# Altium PCB dalang-v1.3_20211125.PcbDoc (part 5 of 5)
Units mil, origin at the board's own origin, x right, y up, seen from the top; angles counter-clockwise.
Board outline 4000 x 3999.92 mil, 4 copper layers (Top, gnd, vcc, Bottom), stack 35.4 mil thick; 365 components, 335 nets, 1640 pads, 1414 vias.
Unrouted connection lines stored in the file: 894.
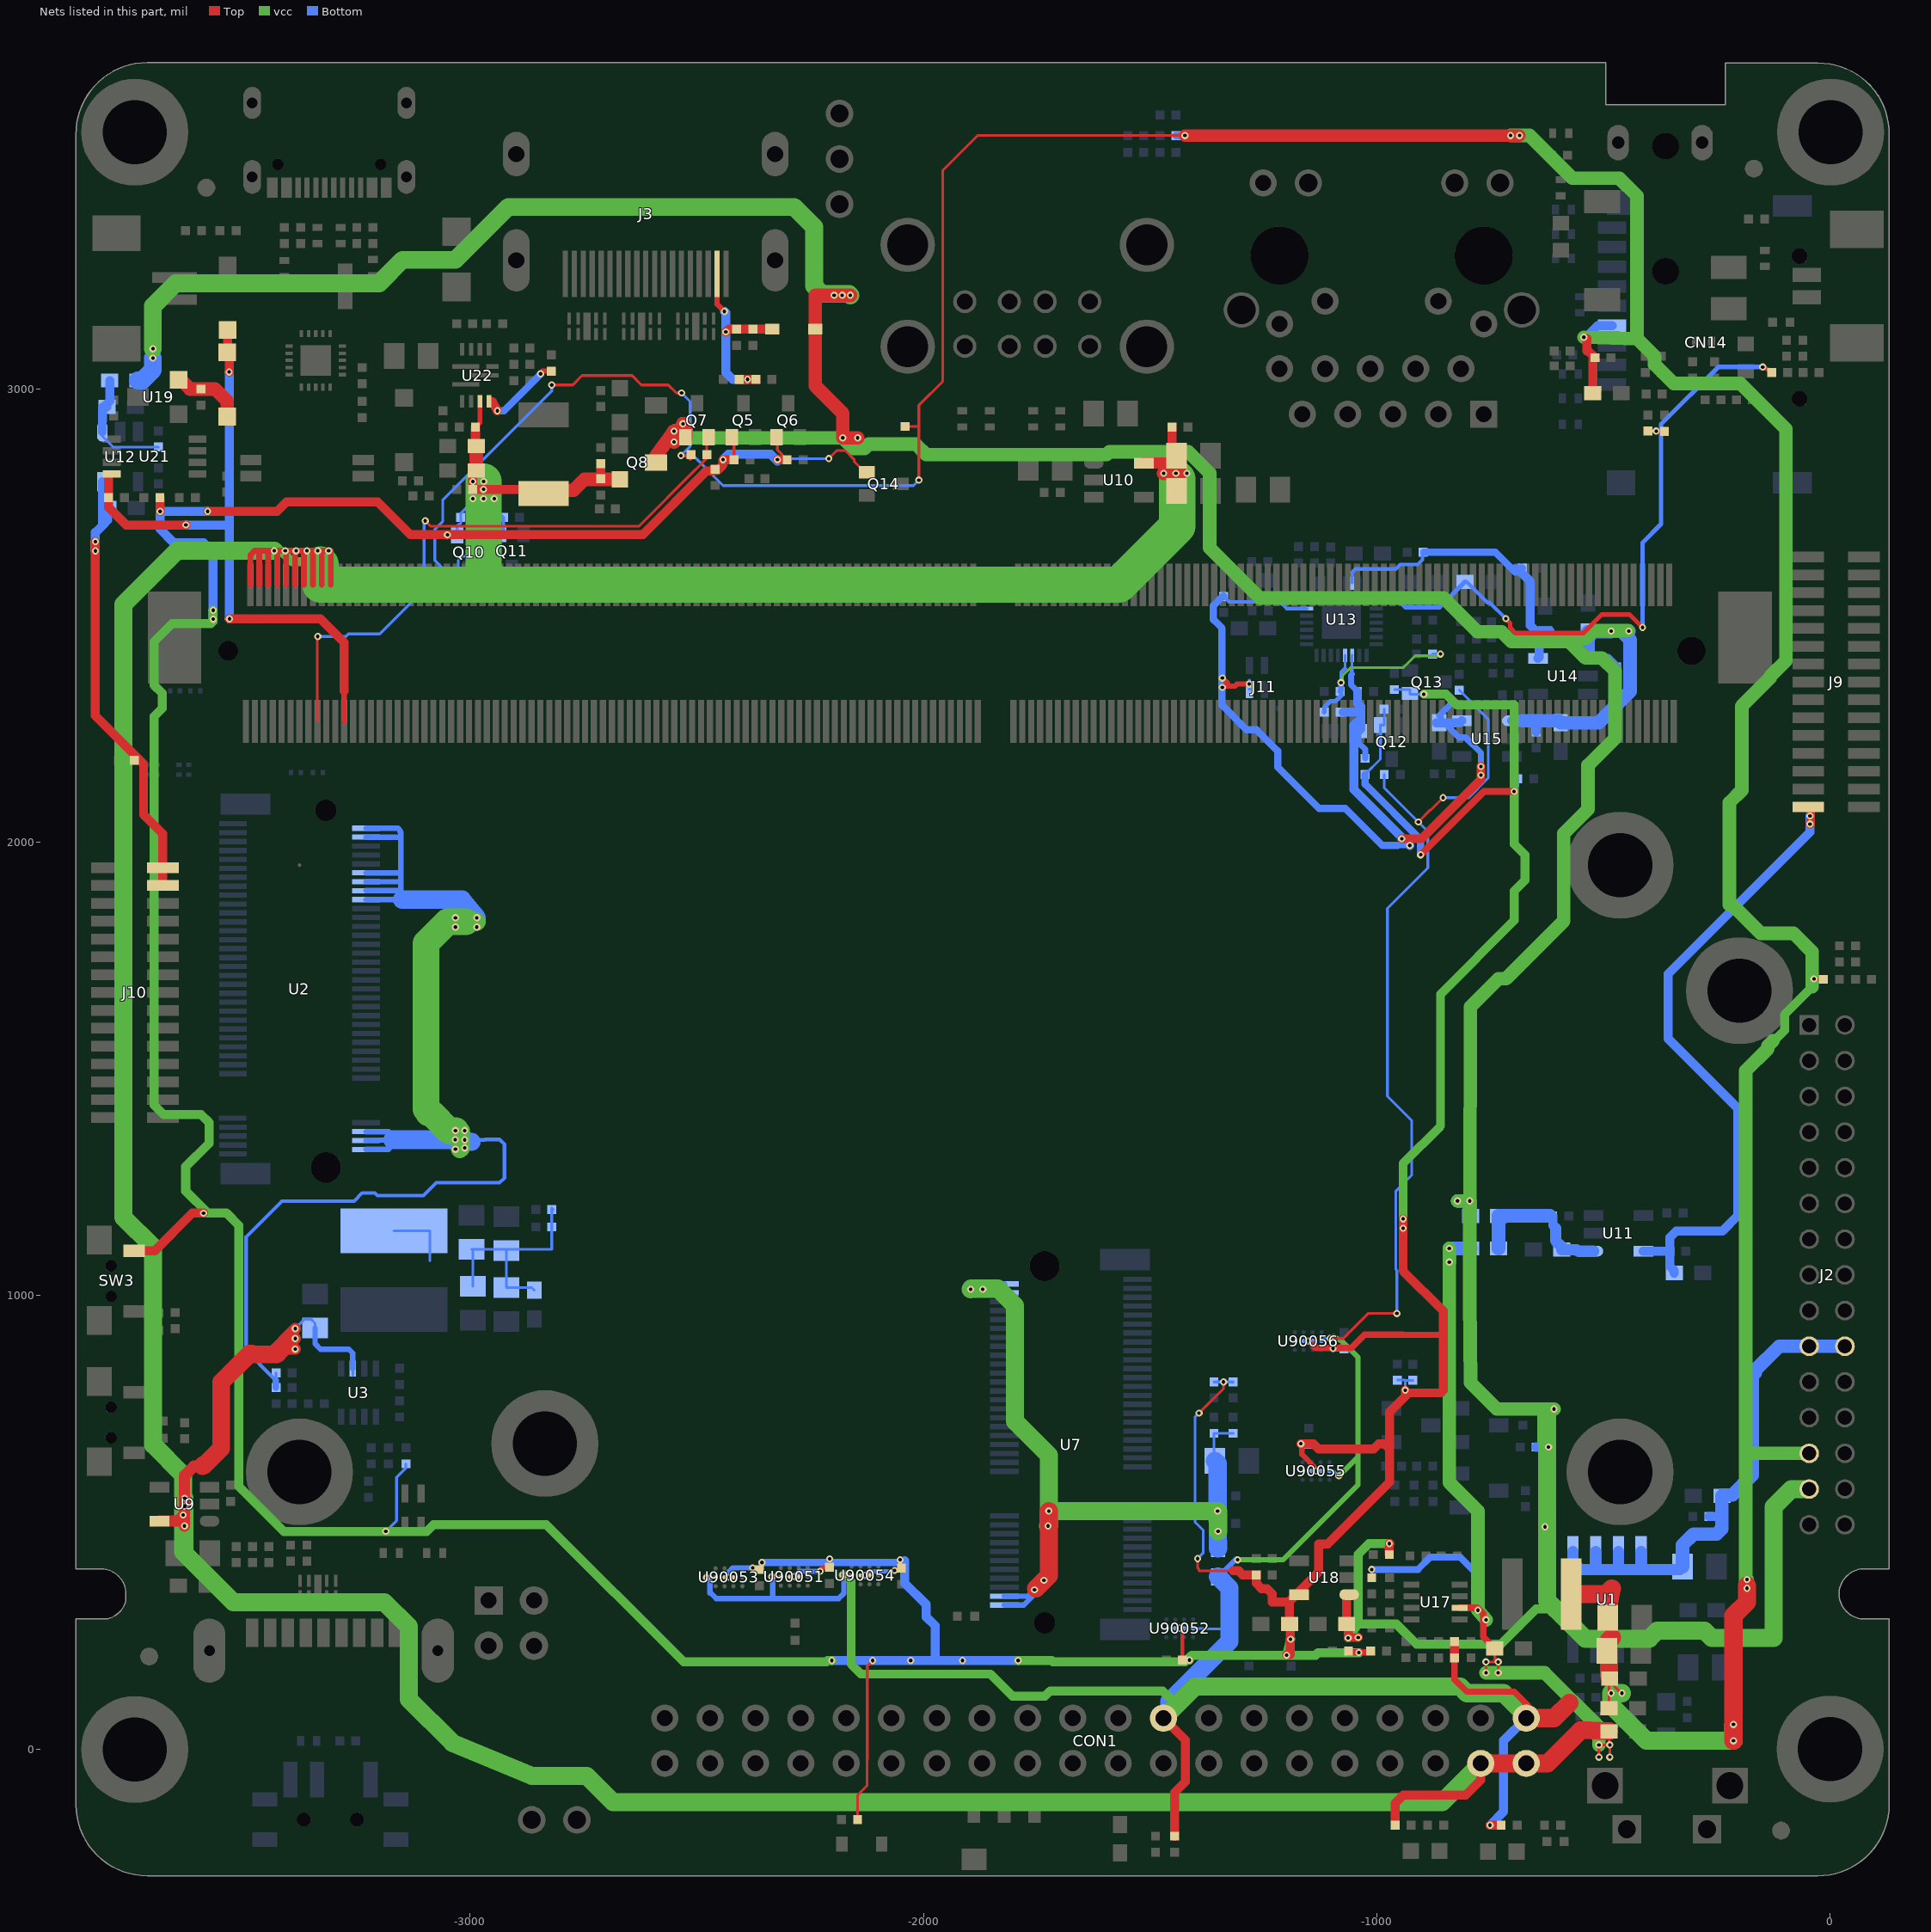
[diagram p6: the nets of this part, all layers, seen from the top]

## Via types
v1: diameter 15.75, hole 7.87, Top to Bottom, 1414 vias

## Nets (pads, with @x,y where several pads share a name; then routed paths per layer and width w, separated by ;. In a path a pad name is that pad's centre, name@x,y a point inside that pad or via, vN(x,y) a via of type N, cw(c..) or ccw(c..) an arc to the next point about the centre after c; other vN are vias at no path point) (continued)
VCC3V3_PCIE: C22.2 C25.1 C26.1 C27.1 C28.1 C29.1 C30.1 C31.1 L1.2 R23.1 U2.2 U2.4 U2.12 U2.14 U2.16 U2.18 U2.70 U2.72 U2.74 | length 3841.4
  vcc w5.91: v1(-3032.48,1322.83) -3022.8,1322.83 ; v1(-3032.48,1364.17) -3020.67,1364.17 v1(-3011.81,1364.17) ; -3022.11,1323.53 -3020.67,1324.97 -3019.85,1325.79 v1(-3011.81,1325.79) ; v1(-2985.24,1812.99) -2985.24,1824.8 v1(-2985.24,1833.66)
  vcc w39.37: -3022.8,1322.83 -3022.11,1323.53 ; -3020.67,1324.97 -3020.67,1364.17 ; -3008.86,1824.8 -2985.24,1824.8
  vcc w59.06: v1(-3032.48,1364.17) -3047.24,1364.17 -3085.63,1402.56 -3091.54,1402.56 -3091.54,1405.51 -3097.44,1411.42 -3097.44,1777.56 -3050.2,1824.8 -3008.86,1824.8
  Bottom w5.91: C22.2@-3428.72,797.24 C22.2@-3428.15,797.24 ; -3428.72,813 -3428.15,813.57 R23.1@-3428.15,829.72 ; -3179.93,1361.81 -3034.84,1361.81 v1(-3032.48,1364.17) ; L1.2@-3168,1142.61 -3088.58,1142.61 -3088.58,1076.8 ; C25.1@-2997.05,1102.36 C25.1@-2996.89,1102.36 ; C28.1@-2994.09,1020.67 -2994.09,1099.57 C25.1@-2996.89,1102.36 ; C29.1@-2858.27,1011.81 -2864.17,1017.72 C26.1@-2920.28,1017.72 C27.1@-2920.28,1099.41 C27.1@-2923.23,1102.36 ; C25.1@-2996.89,1102.36 C27.1@-2923.23,1102.36 ; C27.1@-2923.23,1102.36 -2819.88,1102.36 C30.1@-2819.88,1151.57 C31.1@-2819.88,1189.96 ; C31.1@-2819.88,1189.96 -2819.88,1192.91 -2816.93,1189.96 C31.1@-2819.88,1189.96
  Bottom w6: -3153,1873.62 -3150,1873.62
  Bottom w7.87: -3428.72,813 -3436.8,821.08 -3494.09,878.38 -3494.09,1129.92 -3415.35,1208.66 -3255.98,1208.66 -3238.26,1226.38 -3210.31,1226.38 -3204.4,1220.47 -3103.08,1220.47 -3074.54,1249.02 -2934.89,1249.02 -2924.13,1259.77 -2924.13,1333.58 -2935.04,1344.49 -2967.03,1344.49 -2968.01,1343.5 v1(-3011.81,1343.5)
  Bottom w12: U2.74@-3229.72,1322.44 -3180,1322.44 -3171,1331.44 -3171,1343.5 ; U2.72@-3229.72,1342.12 -3171,1343.5 ; U2.70@-3229.72,1361.81 -3179.93,1361.81 -3171,1352.88 -3171,1343.5 ; U2.18@-3229.72,1873.62 -3153,1873.62 -3153,1893.31 ; U2.16@-3229.72,1893.31 -3153,1893.31 ; U2.14@-3229.72,1912.99 -3153,1912.99 ; U2.12@-3229.72,1932.68 -3153,1932.68 ; U2.4@-3229.72,2011.42 -3153,2011.42 ; U2.2@-3229.72,2031.1 -3159,2031.1 -3154.45,2026.55 -3154.45,2023.45 -3153,2022 -3153,2011.42 ; -3153,1893.31 -3153,1912.99 ; -3153,1912.99 -3153,1932.68 ; -3153,1932.68 -3153,2011.42
  Bottom w15: C22.2@-3428.72,797.24 -3428.72,813
  Bottom w40: -3171,1343.5 v1(-3011.81,1343.5) -3006.99,1342.08 -2997,1339.12 ; -3150,1873.62 -3017.72,1873.62 v1(-2985.24,1833.66)
  other v1: -3033,1344 -3032.48,1812.99 -3032.48,1833.66
VCC3V3_SYS: C49.1 C50.1 C83.2 C84.1 C89.2 C92.1 C93.1 CN14.4 CON1.1 CON1.17 J2.25 L2.2 R6.2 R32.1 R37.1 R78.2 R85.1 R89.1 R127.1 R129.1 R132.1 R134.1 R136.1 R90556.2 U90051.A2 U90052.A2 U90053.A2 U90054.A2 U90055.A2 U90056.A2 | length 16036.9
  Top w5.91: v1(-2819.88,3008.86) -2773.64,3008.86 -2752.97,3029.53 -2642.85,3029.53 -2622.18,3008.86 -2562.89,3008.86 -2545.17,2991.14 v1(-2533.46,2991.14) ; -2513.72,2844 -2513.72,2854.39 R32.1@-2512.8,2855.31 ; v1(-2478.35,377.95) -2477.62,378.68 U90053.A2@-2458.44,378.68 ; v1(-2334.65,379.92) -2334.59,379.86 U90051.A2@-2314.53,379.86 ; v1(-2177.17,383.86) -2176.18,382.87 U90054.A2@-2158.46,382.87 ; R136.1@-2040.35,2917.32 -2040.27,2917.41 -2022.22,2917.41 -2022.14,2917.32 -2010,2917.32 ; v1(-1103.15,905.51) -1074.18,905.51 -1019.06,960.63 v1(-955.51,960.63) ; v1(-908.27,2044.88) -881.5,2071.65 -880.32,2071.65 v1(-853.54,2098.43) ; C92.1@-490.16,289.37 -487.5,286.71 -487.5,246 -487.5,239.91 -487.5,216.54 C93.1@-492.13,216.54 -487.5,211.91 -486.22,210.63 C49.1@-486.22,155.51 ; C50.1@-487.5,90 -487.5,123 C49.1@-487.5,150.22 ; C49.1@-487.5,153.54 C49.1@-487.5,150.22 ; v1(-459,123) -460.28,123 C49.1@-487.5,150.22 ; v1(-35.43,1698.82) -34.45,1697.83 R6.2@-14.76,1697.83
  Top w6: v1(-2535,2853) -2522.72,2853 -2513.72,2844 ; v1(-2010,2799) -2010,2917.32 -2010,2964 -1957.47,3016.53 -1957.47,3482.28 -1880.7,3559.06 v1(-1423.23,3559.06) ; v1(-543,3114) v1@-536.72,3111 ; C49.1@-487.5,153.54 -487.5,162 C49.1@-486.22,155.51 C49.1@-487.5,153.54
  Top w13.78: R85.1@-828.28,201 -828.28,153.54 -801.18,126.44 -696.85,126.44 -667.32,96.91 -670.47,93.76 CON1.1@-670.47,68.11
  Top w20: CON1.17@-1470.47,68.11 -1422,19.64 -1422,-72 -1446,-96 R78.2@-1446,-192.28 ; R85.1@-828.28,201 C89.2@-828.28,237 ; v1(-750,-168) R89.1@-725.72,-168 ; v1@-536.72,3111 -536.72,3084 -533.72,3084 C84.1@-518.72,3069 -523.5,3064.22 C83.2@-523.5,2991 ; -487.5,246 -481.4,246
  Top w27.56: v1(-1423.23,3559.06) v1(-704.72,3559.06) v1(-685.04,3559.06)
  Top w40: CON1.1@-670.47,68.11 -609,68.11 -575.11,102 ; L2.2@-571.04,342 -493.4,342 -481.4,354 -487.5,323.91 C92.1@-487.5,286.71 ; C49.1@-487.5,162 -487.5,211.91 C93.1@-487.5,216.54 ; C93.1@-487.5,239.91 -481.4,246 ; v1(-213,18) v1(-213,54) -213,294.02 -183,324.02 -183,360.17 v1(-183.07,354.33)
  vcc w11.81: v1(-1307.09,417.32) -1206.71,417.32 -1041.26,582.77 -1041.26,644.76 ; v1(-1103.15,905.51) -1094.88,909.45 -1076.77,899.61 -1041.26,864.09 -1041.26,644.76 ; v1(-1083.66,602.36) -1041.26,644.76
  vcc w19.68: v1(-2177.17,383.86) -2173.23,383.86 -2159.45,370.08 -2159.45,187.01 -2137.8,165.35 -1852.36,165.35 -1803.15,116.14 -1732.28,116.14 -1720.47,127.95 -1472.44,127.95 -1441.54,97.05 ; -125.98,1562.01 -124.02,1562.01 -100.39,1585.63 -100.39,1620.08 -39.37,1681.1
  vcc w30: v1(-704.72,3559.06) v1(-685.04,3559.06) -662.72,3559.06 -568.67,3465 -465,3465 -426,3426 -426,3111 ; v1(-543,3114) -426,3111 ; v1(-183.07,374.02) v1(-183.07,354.33) -183.07,354.09 -186,357.02 -186,640.75 ; -125.98,1562.01 -137.29,1550.7 -137.29,1544.77 -186,1496.06 -186,640.75 ; J2.25@-46,652.12 -174.63,652.12 -186,640.75 ; -39.37,1681.1 -39.37,1758.13 -80.71,1799.46 -153.1,1799.46 -215.84,1862.2 -222,1862.2 -222,2087.56 -194.84,2114.72 -194.84,2300.16 -131.36,2363.64 -131.36,2366.59 -97.44,2400.51 -97.44,2911.44 -198,3012 -345,3012 -387,3054 -387,3072 -426,3111
  vcc w40: CON1.17@-1470.47,68.11 -1441.54,97.05 -1400.58,138 -816,138 -801,123 -720,123 -670.47,73.47 CON1.1@-670.47,68.11 ; v1(-459,123) v1(-483,123) -483,96 -405,18 v1(-213,18) v1(-213,54)
  Bottom w5.91: R129.1@-2926.18,2568.9 -2988.19,2630.91 -3017.15,2630.91 -3026.57,2621.48 R127.1@-3026.57,2571.85 ; v1(-2819.88,3008.86) -2819.88,2995.27 -3060.53,2754.62 -3060.53,2707.37 -3077.83,2690.07 -3077.83,2621.65 -3055.95,2599.76 -3054.49,2599.76 R127.1@-3026.57,2571.85 ; v1(-2535,2853) -2514.69,2873.31 -2514.69,2972.36 v1(-2533.46,2991.14) ; v1(-2334.65,379.92) v1@-2334.45,379.72 ; U90052.A2@-1405.12,266.14 -1383.27,266.14 -1381.89,264.76 -1324.78,264.76 ; U90056.A2@-1121.78,899.79 -1116.06,905.51 v1(-1103.15,905.51) ; U90055.A2@-1104.33,613.19 -1094.49,613.19 v1(-1083.66,602.36) ; R132.1@-983.46,2149.61 -983.46,2120.08 v1(-908.27,2044.88) -887.32,2023.94 -887.32,1943.29 -976.34,1854.27 -976.34,1439.84 -923.17,1386.67 -923.17,1265.21 -957.76,1230.63 -957.76,1057.88 -955.51,1055.64 v1(-955.51,960.63) ; v1(-853.54,2098.43) -797.3,2098.43 -754.25,2141.48 -754.25,2271.97 R134.1@-817.72,2335.43 ; R127.1@-3026.57,2571.85 -3026.57,2565.94 R127.1@-3020.67,2565.94 R127.1@-3026.57,2571.85
  Bottom w6: v1(-2535,2853) -2508,2853 -2442,2787 -2022,2787 v1(-2010,2799)
  Bottom w11.81: v1(-2478.35,377.95) -2470.87,370.47 -2470.87,343.7 -2469.29,343.7 -2457.09,331.5 -2332.68,331.5 ; v1@-2334.45,379.72 -2332.68,377.95 -2332.68,331.5 ; v1(-2177.17,383.86) -2175.59,382.28 -2175.59,342.91 -2187.01,331.5 -2332.68,331.5 ; R37.1@-1350,380 -1347.73,380 -1347.73,381.23 -1309.36,419.6 v1(-1307.09,417.32)
  Bottom w15.75: R90556.2@-1442.91,3559.06 v1(-1423.23,3559.06)
  Bottom w20: v1(-750,-168) -720,-138 -720,18.58 CON1.1@-670.47,68.11 ; v1(-543,3114) -541.02,3115.98 -536.78,3115.98 -513,3139.76 CN14.4@-480.93,3139.76
  Bottom w40: CON1.17@-1470.47,68.11 -1457.87,80.71 -1457.87,104.33 -1324.78,237.42 -1324.78,264.76 -1324.78,354.78 R37.1@-1350,380
VCC3V3_WF: C34.1 C35.1 C36.1 R35.1 R36.1 R37.2 U7.2 U7.4 U7.72 U7.74 | length 1917.5
  Top w6: v1(-1755,351) v1@-1752,354
  Top w40: v1@-1752,354 v1(-1734,372) -1723.5,382.5 v1(-1723.5,525)
  vcc w6: v1(-1351,525) v1@-1351,527
  vcc w40: v1(-1896,1014) -1894.5,1015.5 -1836,1015.5 -1798.5,978 -1798.5,723 -1723.5,648 v1(-1723.5,525) ; v1(-1725,492) -1723.5,492 v1(-1723.5,525) ; v1(-1350,480) -1350,525 v1(-1351,525) v1(-1723.5,525)
  Bottom w6: C36.1@-1357.4,636 -1359,636 R35.1@-1359,696.28 R36.1@-1317,696.28 ; C35.1@-1351,504 C35.1@-1346.72,498 ; C34.1@-1351,552 C34.1@-1346.72,558
  Bottom w12: v1(-1869,1014) v1@-1869,1006.3 ; U7.2@-1821.46,317.32 -1779,317.32 -1755,341.32 v1(-1755,351) -1768.99,337.01 U7.4@-1821.46,337.01 ; U7.72@-1821.46,1006.3 v1@-1869,1006.3 ; U7.74@-1821.46,1025.99 -1887,1025.99 -1876.04,1014 -1872.83,1010.49 v1@-1869,1006.3
  Bottom w30: v1(-1896,1014) -1876.04,1014 v1(-1869,1014) ; v1(-1755,351) v1(-1734,372)
  Bottom w40: C36.1@-1357.4,636 -1351,629.6 -1351,552 v1(-1351,525) -1351,504 -1350.9,497.93 -1350.61,479.99 R37.2@-1350,442
VCC5V0: C54.1 R61.2 R62.2 R63.1 U11.1 | length 345.6
  Bottom w6: R63.1@-618,1176 R63.1@-611.72,1176
  Bottom w20: R63.1@-611.72,1176 -611.72,1155 -605.33,1148.61
  Bottom w25: -605.33,1148.61 -605.33,1121.07 -590.55,1106.3 C54.1@-590.55,1101.38 ; C54.1@-591.54,1101.38 C54.1@-590.55,1101.38 ; U11.1@-522,1098 -555.12,1098 -558.5,1101.38 C54.1@-590.55,1101.38
  Bottom w30: R62.2@-731,1104 R61.2@-731,1176 R63.1@-618,1176
VCC5V0_HDMI: C32.1 C33.1 D1.2 J3.18 R29.1 R31.1 | length 421.6
  Top w6: D1.2@-2333.24,3131.72 D1.2@-2333.24,3132
  Top w12: J3.18@-2455.19,3253.6 -2455.19,3187.19 v1(-2439,3171)
  Top w20: v1(-2436,3126) -2434.71,3126.31 -2429.3,3131.72 C33.1@-2412,3131.72 C32.1@-2376,3131.72 D1.2@-2333.24,3131.72 ; R29.1@-2406.28,3021 v1(-2388,3021) R31.1@-2369.72,3021
  Bottom w20: v1(-2439,3171) -2436,3168 v1(-2436,3126) -2436,3036 -2421,3021 v1(-2388,3021)
VCC5V0_MIPI: C56.1 R64.1 R130.2 U12.1 | length 294.3
  Bottom w5.91: U12.1@-3811.44,2905.61 -3811.44,2895.77 -3787.59,2871.92 R64.1@-3687.75,2871.92
  Bottom w19.68: U12.1@-3811.44,2905.61 -3811.44,2915.46 -3810.67,2937.99 ; C56.1@-3801.04,2960.5 C56.1@-3807.92,2960.5 ; R130.2@-3794.91,3018.6 -3794.91,2973.5 -3804.48,2963.93 C56.1@-3807.92,2960.5 ; -3810.67,2937.99 C56.1@-3809.96,2958.45 ; -3810.67,2937.99 -3810.67,2957.75 C56.1@-3809.96,2958.45 ; C56.1@-3809.96,2958.45 C56.1@-3807.92,2960.5 ; C56.1@-3809.96,2958.45 -3809.89,2960.5 C56.1@-3807.92,2960.5
VCC5V0_SYS: C23.1 C51.1 C90.1 C100.2 C101.2 C102.1 C105.1 C106.1 C107.1 C108.1 CON1.2 CON1.4 L3.2 Q8.2 R62.1 R83.2 R91.1 R94.2 R95.1 U3.2 U9.5 U10.5 U17.2 U22.5 | length 13799.4
  Top w6: R83.2@-1011,377.72 v1(-1011,396) ; v1(-759,168) v1(-759,192) v1(-732,192) ; C90.1@-739.5,222 -739.5,196.5 v1(-732,192) ; v1(-732,168) v1(-732,192) ; v1(-510,-18) v1(-510,9) v1(-486,9) ; C51.1@-487.5,39 -487.5,10.5 v1(-486,9) ; v1(-486,-18) v1(-486,9)
  Top w10: C108.1@-2988.28,2916 -2978.16,2926.13 U22.5@-2978.16,2972.91
  Top w13: -3484.65,2567.72 -3484.65,2634 -3475.65,2643 -3464.96,2643 ; -3464.96,2567.72 -3464.96,2643 ; -3445.28,2567.72 -3445.28,2643 ; -3425.59,2567.72 v1@-3425.59,2643 ; -3405.91,2567.72 v1@-3405.91,2643 ; -3386.22,2567.72 v1@-3386.22,2643 ; -3366.54,2567.72 v1@-3366.54,2643 ; -3346.85,2567.72 -3346.85,2643 ; -3327.17,2567.72 -3327.17,2643 ; -3307.48,2567.72 -3307.48,2643 v1(-3312,2643) -3327.17,2643 ; -3464.96,2643 -3445.28,2643 ; -3445.28,2643 v1(-3432,2643) v1@-3425.59,2643 ; v1@-3425.59,2643 v1(-3408,2643) v1@-3405.91,2643 ; v1@-3405.91,2643 v1@-3386.22,2643 ; v1@-3386.22,2643 v1(-3384,2643) v1@-3366.54,2643 ; v1@-3366.54,2643 v1(-3360,2643) -3346.85,2643 ; -3346.85,2643 v1(-3336,2643) -3327.17,2643
  Top w15: U17.2@-816.85,311.2 -778.24,311.2 v1@-777,309.96 ; v1(-777,306) v1@-777,309.96 ; C90.1@-739.5,222 -765,247.5 -765,297.96 v1@-777,309.96
  Top w20: C108.1@-2988.28,2916 -2988.28,2875.78 C105.1@-2986.5,2874 ; C106.1@-2986.5,2820 -2994.28,2812.22 C107.1@-2994.28,2778 -2846.61,2778 -2844.56,2775.94 L3.2@-2838,2769.39 ; R95.1@-2712,2801.72 R94.2@-2712,2835.28 ; C102.1@-1451.72,2916 -1451.72,2877 -1441.4,2866.68 C100.2@-1441.4,2853 ; R91.1@-959.72,-168 -959.72,-120 -941.72,-102 -804,-102 -770.47,-68.47 CON1.4@-770.47,-31.89
  Top w25: U9.5@-3685.12,502.6 -3645,502.6 v1@-3633,514.6 ; v1(-3633,516) v1@-3633,514.6 ; v1(-3630,492) v1@-3630,517.6 ; v1(-3629.92,535.43) v1(-3629.92,535.43) ; v1(-3629.92,553.15) v1(-3629.92,553.15) ; -3590.55,624 -3609,624 -3630,603 v1(-3629.92,553.15) ; v1(-3385.83,881.89) -3415.37,881.93 ; v1(-3385.83,905.51) -3391.78,905.51 -3415.37,881.93 ; v1(-3385.83,927.17) -3387.8,925.2 -3387.86,925.2 -3396.68,916.37 -3431.11,881.95 -3415.37,881.93 ; U10.5@-1513.88,2836.4 -1446,2836.4 -1446,2848.4 C100.2@-1441.4,2853 ; v1@-3633,514.6 v1@-3630,517.6 ; v1@-3630,517.6 v1(-3629.92,535.43) ; v1(-3629.92,535.43) v1(-3629.92,553.15)
  Top w30: C106.1@-2986.5,2820 C105.1@-2986.5,2874 ; L3.2@-2844.56,2775.94 -2844,2776.5 -2772,2776.5 -2748,2800.5 Q8.2@-2670,2800.5 ; v1(-1470,2814) v1(-1443,2814) -1441.4,2792.47 -1440.11,2775.1 -1440,2773.6 C101.2@-1441.4,2775
  Top w39.37: -3590.55,624 -3588.57,625.98 -3586.08,625.98 -3549.21,662.85 -3549.21,809.06 -3486.21,872.06 -3482.27,872.06 -3480.32,870.1 -3427.19,870.1 -3415.37,881.93
  Top w40: C101.2@-1441.4,2775 -1441.4,2792.47 C100.2@-1441.4,2853 ; CON1.4@-770.47,-31.89 CON1.2@-670.47,-31.89 -622.89,-31.89 -549,42 C51.1@-487.5,39
  vcc w6: -3330,2613 -3330,2619 ; v1(-1443,2814) -1440,2811 -1440,2801.07
  vcc w20: v1(-3432,2643) -3417,2643 -3393,2619 -3330,2619
  vcc w30: -1461,2814 v1(-1443,2814) v1(-1419,2814) ; v1(-840,1104) v1(-840,1074) -840,588 -777,525 v1(-777,306) v1(-759,285) ; v1(-759,168) v1(-732,168) -629.76,168 -510,48.24 v1(-510,9)
  vcc w40: v1(-3629.92,553.15) v1(-3629.92,535.43) -3629.92,516 -3629.92,431.92 ; v1(-3432,2643) -3646.49,2643 -3764.76,2524.73 -3764.76,1172.76 -3699.8,1107.8 -3699.8,671.26 -3633,604.46 v1(-3633,516) -3633,435 -3629.92,431.92 ; CON1.4@-770.47,-31.89 -855.58,-117 -2685.17,-117 -2742.79,-59.37 -2864.17,-59.37 -3038.95,13.2 -3135,109.25 -3135,270 -3189,324 -3522,324 -3629.92,431.92
  vcc w80: -3330,2613 -3330,2568 -2937,2568 ; v1(-2970,2796) -2970,2778.54 -2970,2586 -2937,2568 ; -1440,2801.07 -1440,2697 -1569,2568 -2937,2568
  Bottom w5.91: U3.2@-3258.8,824 U3.2@-3258.8,839.15
  Bottom w6: v1(-3385.83,881.89) -3385.3,905.5 -3384.81,927.14 -3384.8,927.8 -3384.8,928.5 -3365.3,948 -3351,948 -3342,939 C23.1@-3342,928.6
  Bottom w12: C23.1@-3342,928.6 -3342,894 -3330,882 -3267.8,882 -3258.8,873 U3.2@-3258.8,839.15
  Bottom w15: v1(-1011,396) -909,396 -882,423 -816,423 -777,384 v1(-777,306)
  Bottom w30: v1(-840,1074) v1(-840,1104) R62.1@-793,1104
  other v1: -2994.09,2757.87 -2970.47,2757.87 -2946.85,2757.87 -2970.47,2778.54 -2994,2796
VCC5V0_USB: C75.1 C80.1 C94.1 D1.1 J2.27 Q7.1 Q8.3 R10.2 R11.2 R17.2 R61.1 R73.1 R76.1 R93.1 R130.1 U14.1 U15.1 U18.1 | length 10907.2
  Top w6: Q7.1@-2529.07,2893.32 -2528.99,2893.32 -2528.71,2893.6 Q7.1@-2524.59,2893.6
  Top w20: U18.1@-1060.88,340.6 -1066.5,334.98 C94.1@-1066.5,276 -1062.99,276 v1(-1062.99,245.08) v1(-1041,246) ; R93.1@-972.28,429 -972.28,443.72 v1(-972,453)
  Top w30: Q8.3@-2590,2838 -2590,2852 -2561.42,2891.3 v1(-2550,2907) ; v1(-2550,2883) v1(-2550,2907) ; v1(-2530.51,2923.23) -2530.51,2921.65 -2524.59,2915.72 Q7.1@-2524.59,2893.6 ; Q7.1@-2529.07,2893.32 -2539.01,2899.82 v1(-2550,2907) ; v1(-2161.42,3206.69) v1(-2179.13,3206.69) v1(-2196.85,3206.69) -2238.76,3206.69 D1.1@-2238.76,3132 -2238.76,3032.48 -2238.76,3006.76 -2178,2946 v1(-2178,2892) v1(-2145,2892)
  vcc w6: -624,450 -606,309 ; -624,744 -624,747 -624,750 ; v1@-622.5,667.5 v1(-621,666) ; v1@-445.25,2467.25 v1(-444,2466)
  vcc w20: v1(-1062.99,245.08) -1055.17,256.08 -1041,276 ; v1(-972,453) -1017,453 -1041,429 -1041,276 ; v1(-628.94,490.16) -628.94,597 -624,643 v1(-621,666) ; v1@-622.5,667.5 -624,669 -636,681 -636,735 -624,747 -621,750 ; -606,309 -648,309 -726,231 -912,231 -957,276 -1041,276
  vcc w30: v1(-2550,2907) -2539.81,2901.34 -2523,2892 ; v1(-2530.51,2923.23) -2523,2915.72 -2523,2892 ; v1(-822,1209) v1(-795,1209) -795,990 ; v1(-609,750) -621,750 -624,750 -735,750 -793,808 -795,990 ; v1(-483,2466) v1@-483,2467.25 ; v1@-445.25,2467.25 v1@-483,2467.25 ; -2523,2892 v1(-2178,2892) -2154.9,2868.9 -2129.81,2868.9 -2120.36,2878.35 -2017.35,2878.35 -1994.12,2855.12 -1596,2855.12 -1589.7,2861.42 -1415.49,2861.42 -1368.5,2814.43 -1368.5,2649.29 -1258.19,2538.98 -852.12,2538.98 -777.71,2464.57 -724.61,2464.57 -702.95,2442.91 -576.22,2442.91 -569.88,2449.25 ; -795,990 -794.46,1209 -793.45,1621.06 -793.45,1636.97 -731.41,1699.01 -714.92,1699.01 -587.6,1826.32 -587.6,2019.18 -533.94,2072.83 -533.94,2169.77 -474.13,2229.59 -474.13,2377.55 -503.08,2406.5 -539.43,2406.5 -569.88,2436.94 -569.88,2449.25 ; -569.88,2449.25 -540,2449.25 -522,2467.25 v1@-483,2467.25
  vcc w39.37: v1(-3699.8,3088.58) -3699.8,3183.07 -3649.61,3233.27 -3200.86,3233.27 -3149.18,3284.94 -3032.48,3284.94 -2915.85,3401.57 -2285.43,3401.57 -2240.96,3357.1 -2240.96,3227.36 -2226.2,3212.6 -2220.47,3209.65 -2164.37,3209.65 v1(-2161.42,3206.69)
  vcc w40: -624,744 -624,669 -624,643 -624,450 -624,327 -606,309 -540,243 -399,243 -381,261 -276.72,261 -261,245.28 -124.02,245.28 -124.02,534.45 -85.08,573.38 J2.27@-46,573.38
  Bottom w5.91: v1(-3699.8,3067.91) v1(-3699.8,3088.58)
  Bottom w6: R61.1@-795,1180.54 -793,1178.54 R61.1@-793,1176 ; U14.1@-534,2406 U14.1@-534,2415
  Bottom w19.68: U14.1@-534,2406 -490.28,2406 R73.1@-471,2386.72
  Bottom w20: U15.1@-702,2268 -678,2268 ; -651,2268 -648,2265 ; R11.2@-648.28,666 v1(-621,666) ; R76.1@-648,2243.72 -648,2265 ; R10.2@-636,749.72 -609.28,749.72 v1(-609,750) ; R17.2@-630,534.28 -628.94,534.28 v1(-628.94,490.16) ; C80.1@-595.5,2265 -648,2265
  Bottom w30: v1(-822,1209) v1(-795,1209) R61.1@-795,1180.54 ; -678,2268 -651,2268 C80.1@-598.5,2268 ; U14.1@-534,2415 C75.1@-534,2464.5 -491.84,2465.18 -483.82,2465.18 v1(-483,2466) -460.63,2466 ; v1(-444,2466) -460.63,2466 ; C80.1@-598.5,2268 C80.1@-595.5,2265 ; C80.1@-598.5,2268 C80.1@-595.5,2265 ; C80.1@-595.5,2265 C80.1@-594,2263.5 ; C80.1@-595.5,2265 C80.1@-594,2263.5 ; C80.1@-594,2263.5 -510.82,2263.5 -440.94,2333.37 -440.94,2446.31 -452.32,2457.69 -460.63,2466
  Bottom w39.37: R130.1@-3732.91,3018.6 -3723.43,3018.6 -3699.8,3042.22 v1(-3699.8,3067.91)
VCC_1V8: C85.1 C95.1 C90295.2 C90296.2 C90297.2 C90298.2 C90299.2 C90300.2 Q5.1 Q6.1 Q10.1 Q11.1 Q12.1 Q13.1 Q14.1 R21.1 R28.1 R30.1 R33.2 R34.2 R47.1 R57.2 R58.2 R59.2 R60.2 R81.2 R97.2 R120.2 R123.1 R126.1 R128.1 R131.1 R133.1 SW3.2 U18.5 U90051.B2 U90051.C2 U90052.B2 U90052.C2 U90053.B2 U90053.C2 U90054.B2 U90054.C2 U90055.B2 U90055.C2 U90056.B2 U90056.C2 | length 14301.6
  Top w3.94: C90297.2@-2362.2,395.67 -2360.79,394.25 C90297.2@-2356.32,394.25 ; C90296.2@-2051.18,398.91 C90296.2@-2048.58,398.91
  Top w5.91: U90053.B2@-2438.75,378.68 -2428.74,378.68 v1(-2428.74,378.74) -2424.8,378.68 U90053.C2@-2419.07,378.68 ; v1(-2376.77,399.61) -2371.5,394.33 -2371.5,394.25 -2361.88,394.25 -2361.88,395.35 C90297.2@-2362.2,395.67 ; C90297.2@-2356.32,394.25 v1(-2356.3,411.42) ; U90051.B2@-2294.84,379.86 v1@-2285.43,379.86 ; v1(-2285.04,380.31) v1@-2285.43,379.86 ; U90051.C2@-2275.16,379.86 v1@-2285.43,379.86 ; v1(-2208.66,2846.46) -2190.94,2864.17 -2172.79,2864.17 -2152.56,2843.94 -2152.56,2839.57 -2128.94,2815.94 Q14.1@-2125,2815.94 ; C90295.2@-2207.53,400.61 -2207.53,418.45 v1(-2206.69,419.29) ; U90054.B2@-2138.78,382.87 v1(-2128.74,383.07) -2129.13,382.87 U90054.C2@-2119.09,382.87 ; v1(-1434.65,266.14) v1@-1433.07,266.14 ; C90298.2@-1428.74,199.15 C90298.2@-1428.74,196.06 v1(-1413.39,196.06) ; v1(-1198.82,206.69) v1@-1198.47,207.24
  Top w6: Q5.1@-2422.59,2893.6 -2417.72,2888.72 R28.1@-2417.72,2844 ; Q6.1@-2323.59,2893.6 -2322,2892.01 -2322,2865.28 R30.1@-2300.72,2844 ; R81.2@-2145.28,-156 -2145.28,-102 -2124.28,-81 -2124.28,-24.28 -2124,-24 -2124,183 v1(-2112,195) ; v1(-1395,420) -1395,399 -1392,396 -1392,393 -1317,393 ; v1(-1392,741) -1338,795 v1(-1338,809.72)
  Top w7.87: C90297.2@-2361.88,394.25 C90297.2@-2360.79,394.25 ; v1(-2063.78,393.7) -2060.63,396.85 -2060.63,397.01 -2053.08,397.01 -2051.18,398.91 v1(-2051.18,417.32) ; v1@-1433.07,266.14 -1428.74,261.81 C90298.2@-1428.74,199.15
  Top w9.84: v1(-2227.56,391.73) -2227.56,395.28 -2222.23,400.61 C90295.2@-2207.53,400.61
  Top w11.81: v1@-1165.35,673.23 -1165.35,650 -1133.86,618.5 v1(-1133.86,613.39)
  Top w13.78: v1(-1151.18,900) -1135.83,884.65 v1@-1096.46,884.65 ; v1(-1096.46,883.46) v1@-1096.46,884.65 ; -853.28,913.39 -941.31,913.39 -941.7,913.78 -1026.77,913.78 -1055.91,884.65 v1@-1096.46,884.65
  Top w15: R57.2@-1062.28,216 -1062.28,213.66 -1059.94,213.66 v1(-1039.37,212.6) -1016.06,213.66 -1013.72,213.66 R58.2@-1013.72,216
  Top w15.75: v1(-903.15,1972.44) -763.39,2112.2 v1(-696.85,2112.2)
  Top w19.68: -1192.5,325.5 -1177.4,340.6 -1174.26,343.74 -1127.95,390.05 -1127.95,451.77 -1108.27,451.77 -971.46,588.58 -971.46,661.42 ; v1(-1167.32,673.23) -1165.35,673.23 -1139.76,673.23 -1127.95,661.42 -1006.89,661.42 -995.08,673.23 -983.27,673.23 -971.46,661.42 ; v1(-941.93,1169.29) v1(-941.93,1148.62) -941.93,1054.75 -853.28,966.1 -853.28,913.39 -853.28,791.4 -859.25,785.43 -929.69,785.43 -937.01,778.12 ; v1(-937.01,791.34) -937.01,778.12 ; -971.46,661.42 -971.46,743.67 -937.01,778.12
  Top w20: SW3.2@-3741.14,1098.71 -3740.92,1098.49 -3696,1098.49 -3612.49,1182 v1(-3588,1182) ; R97.2@-3684.28,2760 v1(-3684,2730) ; v1(-3579,2730) -3426,2730 -3405,2751 -3204,2751 -3132,2679 v1@-3050.2,2679 ; v1(-3050.2,2678.15) v1@-3050.2,2679 ; R120.2@-2459.65,2822.83 R120.2@-2464.37,2822.83 ; v1(-2442,2844) v1@-2442.21,2843.24 ; R28.1@-2417.72,2844 -2441.45,2844 -2441.72,2843.72 v1@-2442.21,2843.24 ; v1(-2322,2844) R30.1@-2300.72,2844 ; -1317,393 -1305,393 -1296,384 C85.1@-1265.72,384 -1266,383.72 -1266,365.72 -1254,353.72 -1242,353.72 -1230.28,342 -1230.28,324 -1194,324 -1192.5,325.5 ; v1@-1198.47,207.24 -1196.91,208.8 -1191,208.8 -1191,276 C95.1@-1192.5,276 -1192.5,325.5 ; U18.5@-1171.12,340.6 -1177.4,340.6 -1192.5,325.5 ; v1@-3050.2,2679 -2619,2679 -2479.3,2818.7 -2468.5,2818.7 R120.2@-2467.47,2819.73 ; R120.2@-2467.47,2819.73 -2454.48,2819.73 -2442.21,2832 v1@-2442.21,2843.24 ; R120.2@-2467.47,2819.73 R120.2@-2464.37,2822.83 ; R120.2@-2467.47,2819.73 R120.2@-2464.37,2822.83
  vcc w19.68: v1(-941.93,1148.62) v1(-941.93,1169.29) -941.93,1291.57 -859.25,1374.25 -859.25,1665.35 -696.85,1827.76 -696.85,1892.72 -673.23,1916.34 -673.23,1972.44 -696.85,1996.06 v1(-696.85,2112.2) -696.85,2303.15 -823.82,2303.15 -847.44,2326.77 v1(-896.06,2326.77)
  vcc w20: v1(-3588,1182) -3578.74,1182 ; v1(-3566.93,2492.13) v1(-3566.93,2511.81) -3567,2511.74 -3567,2487 -3571.78,2482.22 -3657.06,2482.22 -3696.85,2442.43 -3696.85,2346.46 -3679.13,2328.74 -3679.13,2295.28 -3696.85,2277.56 -3696.85,1420.28 -3676.18,1399.61 -3593.5,1399.61 -3575.79,1381.89 -3575.79,1336.12 -3627.46,1284.45 -3627.46,1230.72 -3578.74,1182 ; v1(-2202,195) -2211,195 -2214,192 -2529,192 -2832,495 -3081,495 -3096,480 v1(-3186,480) -3411,480 -3510,579 -3510,1154.6 -3537.4,1182 -3578.74,1182 ; v1(-1791,195) -1717.24,195 -1714.17,191.93 -1423.09,191.93 v1@-1413.39,201.63 ; v1(-1413.39,196.06) v1@-1413.39,201.63 ; v1(-1189.96,242.13) v1@-1190.48,240.04 ; v1(-1039.37,212.6) -1129.28,212.6 -1135.19,206.69 v1@-1190.94,206.69 ; v1@-1413.39,201.63 -1408.33,206.69 v1(-1198.82,206.69) ; v1(-1198.82,206.69) v1@-1190.94,238.19 ; v1(-1198.82,206.69) v1@-1190.94,206.69 ; v1@-1190.94,206.69 v1@-1190.94,238.19 ; v1@-1190.94,238.19 -1190.94,239.58 v1@-1190.48,240.04 ; v1@-1190.94,238.19 v1@-1190.48,240.04
  Bottom w5.91: v1(-3186,480) -3162.4,503.6 -3162.4,599.41 -3141.73,620.08 R21.1@-3141.73,628.94 ; v1(-3050.2,2678.15) -3049.21,2677.17 Q10.1@-3028.54,2677.17 -3028.54,2697.83 -3024.61,2701.77 -3022.64,2701.77 -3020.67,2703.74 R126.1@-3020.67,2716.54 -3020.67,2725.39 -3005.91,2740.16 -2949.8,2740.16 R128.1@-2926.18,2716.54 -2926.18,2680.12 Q11.1@-2934.06,2680.12 ; v1(-2322,2844) -2319.54,2846.46 v1(-2208.66,2846.46) ; v1@-2206.69,411.42 v1(-2206.69,419.29) ; v1@-2051.18,411.42 v1(-2051.18,417.32) ; U90052.C2@-1444.49,266.14 v1(-1434.65,266.14) U90052.B2@-1424.8,266.14 ; v1(-1167.32,673.23) -1166.45,672.36 C90300.2@-1150.09,672.36 ; U90056.C2@-1161.15,899.79 v1@-1151.4,899.79 ; v1(-1151.18,900) -1151.4,900 v1@-1151.4,899.79 ; U90055.C2@-1143.7,613.19 v1@-1133.86,613.19 ; U90056.B2@-1141.47,899.79 v1@-1151.4,899.79 ; v1(-1133.86,613.39) v1@-1133.86,613.19 ; U90055.B2@-1124.02,613.19 v1@-1133.86,613.19 ; R123.1@-1025.6,2149.84 -992.13,2183.31 Q12.1@-992.13,2258.66 -983.86,2258.66 R131.1@-983.86,2293.7 ; R133.1@-961.02,2337.01 -926.77,2337.01 Q13.1@-926.77,2328.35 -926.77,2326.77 v1(-896.06,2326.77) ; R60.2@-954.49,813.63 -937.68,813.63 -937.33,813.29 ; v1(-937.01,791.34) -937.33,791.66 -937.33,813.29 ; R59.2@-920.52,813.29 -937.33,813.29 ; v1(-696.85,2112.2) -694.88,2112.2 -694.88,2118.11 -688.98,2124.02 R47.1@-688.98,2139.76
  Bottom w6: v1(-1395,420) -1383,432 -1383,483 -1401,501 -1401,732 v1(-1392,741) ; R33.2@-1359,809.72 v1(-1338,809.72) R34.2@-1317,809.72
  Bottom w9.84: v1(-2128.74,383.07) -2120.08,391.73 -2065.75,391.73 v1(-2063.78,393.7)
  Bottom w11.81: v1(-2428.74,378.74) -2428.74,391.73 -2428.35,391.73 -2420.47,399.61 v1(-2376.77,399.61) ; v1(-2285.04,380.31) -2273.62,391.73 v1(-2227.56,391.73) ; v1(-1096.46,883.46) -1071.93,883.46 C90299.2@-1071.93,882.94
  Bottom w15.75: v1(-2356.3,411.42) -2206.69,411.42 v1@-2051.18,411.42 ; R123.1@-1025.6,2149.84 -1025.6,2127.9 -903.15,2005.44 v1(-903.15,1972.44)
  Bottom w20: v1(-3579,2730) v1(-3684,2730) -3684,2691 -3654,2661 -3588,2661 -3567,2640 -3567,2492.2 v1(-3566.93,2492.13) ; v1(-2442,2844) -2430,2856 -2337,2856 -2322,2841 v1(-2322,2844) ; v1(-2202,195) v1(-2112,195) v1(-2028,195) -1974.41,195 ; v1@-2051.18,411.42 -2045.28,411.42 -2041.34,415.35 -2041.34,366.14 -1994.09,318.9 -1994.09,291.34 -1974.41,271.65 -1974.41,195 ; v1(-1791,195) v1(-1914,195) -1974.41,195
VCC_3V3: C97.1 D4.1 U19.2 | length 161.3
  Top w5.91: D4.1@-3536,2939.13 D4.1@-3536,2956.78
  Top w30: U19.2@-3643.5,3020 -3641.5,3018 -3636,3018 -3618,3000 -3618,2999.72 C97.1@-3594,2999.72 -3563.15,2999.72 -3562.87,3000 -3536,2973.13 D4.1@-3536,2956.78
VCC_CAM: C52.1 C55.1 J9.1 U11.5 | length 1426.6
  Top w19.68: J9.1@-48,2078 -42.83,2072.83 -42.83,2040.35 v1(-44.29,2040.35)
  Bottom w20: U11.5@-411.76,1098 C55.1@-353.72,1098 ; C52.1@-343.5,1050 -343.5,1054.78 -353.72,1065 C55.1@-353.72,1098 ; v1(-44.29,2058.07) v1(-44.29,2040.35) -44.29,2022.64 -357.28,1709.65 -357.28,1566.85 -203.72,1413.28 -203.72,1176.28 -237.28,1142.72 -339,1142.72 -353.72,1128 C55.1@-353.72,1098
VCC_LDO5V: C109.1 U22.6 | length 187.6
  Top w6: -2952,2972.91 -2950.54,2971.46
  Top w10: U22.6@-2958.47,2972.91 -2952,2972.91
  Top w11.81: v1(-2844.49,3033.46) -2844.49,3035.43 -2840.55,3039.37 C109.1@-2820.87,3039.37
  Top w20: -2950.54,2971.46 v1(-2940,2952)
  Bottom w15.75: v1(-2940,2952) -2925.2,2952 -2844.49,3032.71 v1(-2844.49,3033.46)
VCC_MICBIAS: C38.1 C63.1 R41.2 R74.1 U13.26 | length 1513.2
  Top w5.91: C38.1@-401.57,2907.09 v1(-383.46,2907.09) -365.75,2907.09 R41.2@-365.35,2906.69
  Top w9.84: v1(-715.35,2493.31) -705.51,2483.46 -705.51,2473.26 -693.67,2461.42 -544.49,2461.42 -503.54,2502.36 -442.13,2502.36 v1(-413.78,2474.02) ; v1(-148.43,3048.43) -133.64,3040.92 -128.72,3040.92 R74.1@-128.72,3036
  Bottom w5.91: v1(-383.46,2907.09) -372.83,2907.09
  Bottom w7.87: C63.1@-805.12,2574.8 -801.97,2574.8 -756.13,2528.97 -751.01,2528.97 v1(-715.35,2493.31)
  Bottom w9.84: U13.26@-1000.98,2531.5 -949.75,2531.5 -936.37,2518.11 -861.81,2518.11 C63.1@-805.12,2574.8 ; v1(-413.78,2474.02) -413.78,2660.8 -372.83,2701.75 -372.83,2907.09 -372.83,2922.33 -246.74,3048.43 v1(-148.43,3048.43)
VCC_MIPI: C53.1 C57.1 J10.1 J10.2 U12.5 | length 1034.2
  Top w5.91: C57.1@-3740.53,2180.84 -3740.53,2181.77 -3741.46,2181.77 C57.1@-3735.24,2187.99
  Top w19.68: v1(-3826.77,2663.39) v1(-3826.77,2642.72) -3826.77,2279.53 -3735.24,2187.99 -3720.47,2173.23 -3720.47,2061.02 -3678,2018.55 J10.1@-3678,1944 J10.2@-3678,1904.63
  Bottom w19.68: v1(-3826.77,2642.72) v1(-3826.77,2663.39) -3826.77,2684.06 -3826.28,2684.55 -3825.3,2684.55 -3811.02,2698.82 ; U12.5@-3811.44,2795.37 -3811.44,2699.24 -3811.02,2698.82 ; C53.1@-3799.21,2737.2 -3799.21,2710.63 -3811.02,2698.82
VCC_RTC: C99.1 D4.2 D5.2 U21.8 | length 1448.2
  Top w6: -3797.72,2802 U21.8@-3797.72,2805.49 ; -3277.95,2325 -3277.95,2334
  Top w12: U21.8@-3797.72,2805.49 U21.8@-3790.5,2812.71 ; -3277.95,2266.54 -3277.95,2325
  Top w19.68: D4.2@-3536,3080.87 -3535,3081.87 D5.2@-3535,3130.13
  Top w20: -3797.72,2802 C99.1@-3797.72,2760 -3797.72,2739 -3758.72,2700 v1(-3627,2700) ; D4.2@-3536,3080.87 -3531.5,3076.36 v1(-3531.5,3037.4) ; v1(-3531,2493) -3330,2493 -3277.95,2440.95 -3277.95,2334
  Bottom w20: v1(-3627,2700) -3531,2700 ; v1(-3531.5,3037.4) -3531,3036.91 -3531,2700 ; v1(-3531,2493) -3531,2700
VCCA1V8_CODEC: C67.1 C68.1 C72.1 C81.1 J11.1 R123.2 R124.1 U13.3 U13.14 U15.5 | length 2516.1
  Top w11.81: v1(-1340.55,2341.54) -1337.6,2344.49 -1328.74,2344.49 ; v1(-1340.55,2362.2) -1328.74,2350.39 -1328.74,2344.49 ; v1(-1281,2349) -1308.52,2349 -1313.03,2344.49 -1328.74,2344.49
  Top w19.68: v1(-944.88,2007.87) -900.94,2007.87 -770.08,2138.74 v1(-770.08,2148.03) v1(-770.08,2167.32)
  Bottom w5.91: R124.1@-1080.71,2287.01 R124.1@-1074.41,2287.01 ; -1054.95,2386.28 -1054.95,2412.4 U13.3@-1054.13,2412.4 ; C81.1@-868.11,2263.5 -867.83,2263.78 C81.1@-862.2,2263.78 C81.1@-862.2,2279.53 ; -841.54,2306.1 -841.03,2306.1 -838.33,2303.4
  Bottom w6: J11.1@-1281,2337 v1(-1281,2349) ; v1(-1281,2349) -1284,2349 -1283.7,2349.9 -1281,2358 v1(-1281,2349)
  Bottom w7.87: C72.1@-1337.6,2542.32 -1325.79,2530.51 -1213.82,2530.51 -1199.06,2515.75 U13.14@-1154.53,2515.75
  Bottom w9: -1054.95,2371.06 -1054.95,2386.28
  Bottom w11.81: -1358.35,2489.22 -1358.35,2521.57 C72.1@-1337.6,2542.32 ; -1341.34,2472.21 -1340.55,2471.42 v1(-1340.55,2362.2) v1(-1340.55,2341.54) ; -953.94,1993.11 v1(-927.17,1993.11)
  Bottom w13.39: -1054.95,2371.06 -1056.9,2369.11 -1056.9,2347.25 C67.1@-1042.32,2332.68 ; C68.1@-1040.16,2245.28 -1040.16,2219.6 -1025.6,2205.04 R123.2@-1025.6,2185.27
  Bottom w13.78: C81.1@-862.2,2279.53 -858.27,2283.46 ; -838.33,2303.4 -858.27,2283.46 ; v1(-770.08,2148.03) v1(-770.08,2167.32) -770.08,2197.38 -803.8,2231.1 -818.55,2231.1 -850.94,2263.5 -858.27,2270.82 -858.27,2283.46
  Bottom w15.75: C72.1@-1337.6,2542.32 -1337.6,2543.64 -1338.92,2543.64 -1360.31,2522.25 -1360.31,2491.19 -1358.35,2489.22 -1341.34,2472.21 -1341.34,2302.5 -1286.87,2248.03 -1264.95,2248.03 -1218.5,2201.59 -1218.5,2165.93 -1126.98,2074.41 -1069.09,2074.41 -987.8,1993.11 -953.94,1993.11
  Bottom w19.68: R124.1@-1074.41,2287.01 -1035.43,2287.01 ; C67.1@-1042.32,2332.68 -1042.32,2306.1 -1035.43,2299.21 -1035.43,2287.01 ; C68.1@-1040.16,2245.28 -1035.43,2250 -1035.43,2273.23 ; v1(-944.88,2007.87) v1@-944.88,2010.83 ; v1(-927.17,1993.11) v1@-944.88,2010.83 ; -1035.43,2273.23 -1050.29,2258.37 -1050.29,2116.23 v1@-944.88,2010.83 ; -1035.43,2273.23 -1035.43,2287.01
  Bottom w20: C81.1@-868.11,2263.5 -850.94,2263.5 -816.74,2263.5 U15.5@-812.24,2268
VCCA3V0_CODEC: C69.1 C70.1 C76.1 U13.22 U14.5 | length 726.6
  Bottom w5.91: U13.22@-1054.13,2571.85 -1054.13,2595.47
  Bottom w8: -1054.13,2595.47 -1046.76,2602.84 -958.16,2602.84 -948,2613 -909.45,2613 -899.02,2623.43 -899.02,2638.38 C69.1@-898.33,2639.07 ; C69.1@-897.64,2639.76 C69.1@-898.33,2639.07 ; C69.1@-895.67,2639.76 -896.36,2639.07 C69.1@-898.33,2639.07
  Bottom w15.75: C69.1@-895.67,2639.76 -738.19,2639.76 -702.76,2604.33 ; C70.1@-682.46,2596.46 -694.88,2596.46 -702.76,2604.33 ; C70.1@-678.66,2604.56 -702.52,2604.56 -702.76,2604.33
  Bottom w20: C70.1@-682.46,2596.46 -661.81,2575.81 -661.81,2478.47 -644.82,2461.48 ; U14.5@-644.24,2406 -642,2408.24 C76.1@-642,2458.66 ; C76.1@-628.94,2457.68 C76.1@-633.86,2466 ; C76.1@-618,2466 C76.1@-633.86,2466 ; -644.82,2461.48 C76.1@-642,2461.48 ; -644.82,2461.48 C76.1@-642,2458.66 ; C76.1@-642,2458.66 C76.1@-642,2461.48 ; C76.1@-642,2461.48 -642,2464.5 -640.5,2466 C76.1@-633.86,2466 ; C76.1@-642,2461.48 -638.38,2461.48 C76.1@-633.86,2466
VCCIO_CODEC: C90301.1 R65.1 R124.2 U13.4 | length 426.8
  vcc w5.91: v1(-1078.74,2352.36) -1076.38,2354.72 -1075.98,2354.72 -1075.98,2367.19 -1058.27,2384.91 -941.87,2384.91 -915.35,2411.42 -860.24,2411.42 -860.24,2414.37 v1(-859.25,2415.35)
  Bottom w5.91: -1069.88,2382.87 U13.4@-1069.88,2412.4 ; R65.1@-876.97,2415.35 v1(-859.25,2415.35)
  Bottom w9.06: C90301.1@-1080.71,2332.68 -1077.76,2329.72 C90301.1@-1077.76,2324.41 ; v1(-1078.74,2352.36) -1077.76,2352.36 -1077.76,2375 -1069.88,2382.87
  Bottom w9.84: R124.2@-1116.14,2287.01 -1115.35,2287.8 -1115.35,2298.03 -1102.36,2311.02 -1090.55,2311.02 -1077.76,2323.82 C90301.1@-1077.76,2324.41
  Bottom w11.81: C90301.1@-1080.71,2332.68 -1078.74,2334.65 v1(-1078.74,2352.36)
VDD_LCD: C4.1 C5.1 C11.1 J2.19 J2.20 U1.5 U1.6 U1.7 U1.8 | length 1181.6
  Bottom w5.91: J2.19@-53.15,888.34 J2.19@-46,888.34
  Bottom w20: C5.1@-267.28,513 -238.5,513
  Bottom w25: U1.5@-567,435 -567,411 -552,396 -517,396 ; U1.6@-517,435 -517,396 ; U1.7@-467,435 -467,396 ; U1.8@-417,435 -417,396 ; C11.1@-325.4,402 -331.4,396 -417,396 ; -517,396 -467,396 ; -467,396 -417,396
  Bottom w30: C11.1@-325.4,402 -325.4,450 -301.4,474 -250.5,474 -238.5,486 -238.5,513 C4.1@-238.5,558 -236.27,560.24 -215.55,560.24 -171.26,604.53 -171.26,823.82 -165.35,829.72 -165.35,835.19 -112.2,888.34 J2.19@-53.15,888.34 ; J2.19@-46,888.34 J2.20@32.74,888.34
VIN_PWR_BAD#: Q7.2 R32.2 | length 1359.3
  Top w5.91: R32.2@-2478.28,2858.27 -2477.36,2857.35 R32.2@-2477.36,2855.31
  Top w6: -3337.01,2266.54 -3337.01,2452.99 v1(-3336,2454) ; v1(-3099,2709) -3087,2697 -2628,2697 -2502,2823 -2501.74,2823 -2478.28,2846.46 -2478.28,2858.27 -2478.28,2888.72 Q7.2@-2473.41,2893.6
  Bottom w6: v1(-3336,2454) -3274.35,2454 -3268.7,2459.65 -3199.52,2459.65 -3101.6,2557.56 -3101.6,2709 v1(-3099,2709)
pads on no net: AV1.1 AV1.7 AV1.8 CN14.14 CN14.15 J1.1 J1.2 J1.3 J1.4 J1.5 J1.6 J1.7 J1.8 J1.9 J1.10 J1.11 J1.12 J1.13 J1.14 J1.15 J1.16 J1.17 J1.18 J1.19 J1.20 J1.21 J1.22 J1.23 J1.24 J1.25 J1.26 J1.27 J1.28 J1.29 J1.30 J1.31 J1.32 J1.33 J1.34 J1.35 J1.36 J1.37 J1.38 J1.39 J1.40 J1.41 J1.42 J1.43 J1.44 J1.45 J1.46 J1.47 J1.48 J1.49 J1.50 J1.51 J1.52 J1.53 J1.54 J1.55 J1.56 J1.57 J1.58 J1.59 J1.60 J1.61 J1.62 J1.63 J1.64 J1.65 J1.66 J1.67 J1.68 J1.69 J1.70 J1.71 J1.72 J1.73 J1.74 J1.75 J1.76 J1.77 J1.78 J1.79 J1.80 J1.81 J1.82 J1.83 J1.84 J1.85 J1.86 J1.87 J1.88 J1.89 J1.90 J1.91 J1.92 J1.93 J1.94 J1.95 J1.96 J1.97 J1.98 J1.99 J1.100 J1.101 J1.102 J1.103 J1.104 J1.105 J1.106 J1.107 J1.108 J1.109 J1.110 J1.111 J1.112 J1.113 J1.114 J1.115 J1.116 J1.117 J1.118 J1.119 J1.120 J1.121 J1.122 J1.123 J1.124 J1.125 J1.126 J1.127 J1.128 J1.129 J1.130 J1.131 J1.132 J1.133 J1.134 J1.135 J1.136 J1.137 J1.138 J1.139 J1.140 J1.141 J1.142 J1.143 J1.144 J1.145 J1.146 J1.147 J1.148 J1.149 J1.150 J1.151 J1.152 J1.153 J1.154 J1.155 J1.156 J1.157 J1.158 J1.159 J1.160 J1.161 J1.162 J1.163 J1.164 J1.165 J1.166 J1.167 J1.168 J1.169 J1.170 J1.171 J1.172 J1.173 J1.174 J1.175 J1.176 J1.177 J1.178 J1.179 J1.180 J1.181 J1.182 J1.183 J1.184 J1.185 J1.186 J1.187 J1.188 J1.189 J1.190 J1.191 J1.192 J1.193 J1.194 J1.195 J1.196 J1.197 J1.198 J1.199 J1.200 J1.201 J1.202 J1.203 J1.204 J1.205 J1.206 J1.207 J1.208 J1.209 J1.210 J1.211 J1.212 J1.213 J1.214 J1.215 J1.216 J1.217 J1.218 J1.219 J1.220 J1.221 J1.222 J1.223 J1.224 J1.225 J1.226 J1.227 J1.228 J1.229 J1.230 J1.231 J1.232 J1.233 J1.234 J1.235 J1.236 J1.237 J1.238 J1.239 J1.240 J1.241 J1.242 J1.243 J1.244 J1.245 J1.246 J1.247 J1.248 J1.249 J1.250 J1.251 J1.252 J1.253 J1.254 J1.255 J1.256 J1.257 J1.258 J1.259 J1.260 J1.261 J1.262 J1.263 J1.264 J1.265 J1.266 J1.267 J1.268 J1.269 J1.270 J1.271 J1.272 J1.273 J1.274 J1.275 J1.276 J1.277 J1.278 J1.279 J1.280 J1.281 J1.282 J1.283 J1.284 J1.285 J1.286 J1.287 J1.288 J1.289 J1.290 J1.291 J1.292 J1.293 J1.294 J1.295 J1.296 J1.297 J1.298 J1.299 J1.300 J1.301 J1.302 J1.303 J1.304 J1.305 J1.306 J1.307 J1.308 J1.309 J1.310 J1.311 J1.312 J1.313 J1.314 J1.315 J1.316 J1.317 J1.318 J1.319 J1.320 J1.321 J1.322 J3.14 J4.21 J4.22 J7.4 J7.5 J9.16 J9.17 J9.18 J9.19 J9.20 J9.21 J9.22 J9.23 J9.24 J9.25 J9.26 J9.27 J9.28 J9.29 J9.30 J10.16 J10.17 J10.18 J10.19 J10.20 J10.21 J10.22 J10.23 J10.24 J10.25 J10.26 J10.27 J10.28 J10.29 J10.30 J18.6 J18.7 J18.A8 J18.B8 M1.1 M2.1 M3.1 M4.1 M5.1 M6.1 M7.1 M8.1 MIC1.3 MIC1.4 SW2.5 SW2.6 SW3.5 SW3.6 U2.6 U2.8 U2.10 U2.20 U2.22 U2.24 U2.26 U2.28 U2.30 U2.32 U2.34 U2.36 U2.38 U2.40 U2.42 U2.44 U2.46 U2.48 U2.54 U2.56 U2.58 U2.67 U2.68 U2.69 U2.78 U2.79 U7.3 U7.5 U7.8 U7.10 U7.12 U7.14 U7.16 U7.35 U7.37 U7.38 U7.40 U7.41 U7.43 U7.44 U7.46 U7.47 U7.48 U7.49 U7.52 U7.53 U7.54 U7.55 U7.56 U7.59 U7.61 U7.62 U7.64 U7.65 U7.66 U7.67 U7.68 U7.71 U7.73 U7.78 U7.79 U13.10 U13.12 U13.29 U22.4 U22.12 U90056.D1 U90056.D3 U90059.3 U90059.4 U90059.5 U90059.12 U90059.13 U90059.16 U90059.17 U90059.18 U90059.20
copper on no net: | length 2990.5
  Top w4: -3416.93,-222.05 -3416.93,-103.54 -3183.07,-103.54 -3183.07,-222.05 -3416.93,-222.05 ; -3285.43,611.42 ccw(c-3376.38,611.42) -3285.43,611.42 ; -3285.43,1950 ccw(c-3376.38,1950) -3285.43,1950 ; -372.04,611.02 ccw(c-462.99,611.02) -372.04,611.02 ; -372.04,1950 ccw(c-462.99,1950) -372.04,1950

## Polygon pours and split planes (outlines as drawn)
GND on gnd (solid, remove dead copper, pour order 0): -4044,3870 216,3870 216,-450 -4044,-450
GND on Top (solid, remove dead copper, pour order 2): -4044,3870 216,3870 216,-450 -4044,-450
GND on vcc (solid, remove dead copper, pour order 10): -4044,3870 216,3870 216,-450 -4044,-450
VCC5V0_SYS on vcc (solid, remove dead copper, pour order 8): -1380,2853 -1611,2853 -1819.5,2644.5 -2868,2644.5 -2868,2841 -3072,2841 -3072,2667 -3696,2667 -3829.5,2533.5 -3829.5,1203 -3770.25,1143.75 -3770.25,657 -3709.12,595.88 -3696,595.88 -3696,393 -3520.5,217.5 -3285,217.5 -3219.75,152.25 -3219.75,42 -3003.38,-174.38 -546,-174.38 -466.31,-94.69 -466.31,123 -567.66,224.34 -780,224.34 -780,24 -843,-39 -2595,-39 -2595,-21 -2952,-21 -3066,93 -3066,285 -3126,345 -3468,345 -3573,450 -3573,669 -3642,738 -3642,1212 -3711,1281 -3711,2493 -1509,2493 -1380,2622
FT1 on vcc (solid, remove dead copper, pour order 6): -78,435 -78,255 -105,228 -393,228 -420,201 -420,129 -396,105 -231,105 -204,78 57,78 81,102 81,222 -3,306 -3,435
TYPEC_IN on vcc (solid, remove dead copper, pour order 4): -399,294 -210,294 -201,303 -201,2299.5 -158.25,2321.25 -158.25,2574 -229.12,2644.88 -1140,2644.88 -1140,2883 -1321.5,3064.5 -2070,3064.5 -2261.25,3255.75 -3129,3255.75 -3129,3069 -2817,3069 -2784,3102 -2496,3102 -2284.5,2890.5 -2013,2890.5 -1977.75,2855.25 -1668,2855.25 -1642.12,2881.12 -1428,2881.12 -1364.44,2817.56 -1364.44,2598 -1297.22,2530.78 -846,2530.78 -789.61,2474.39 -666,2474.39 -628.8,2437.2 -399,2437.2
GND on Bottom (solid, remove dead copper, pour order 12): -4044,3870 216,3870 216,-450 -4044,-450

## Keep-outs
Top:
  region: -2940,2964 -2739,2964 -2739,2751 -2940,2751 -2940,2964
Keep-Out Layer:
  lines w6: -3869.68,-122.62 ccw(c-3712.11,-122.34) -3712.11,-279.92 ; -3869.69,-122.44 -3869.69,287.4 -3798.82,287.4 ; -3798.78,287.41 ccw(c-3812.9,340.85) -3759.43,326.82 ; -3759.45,326.77 -3759.45,348.03 ccw(c-3815.55,341.14) -3808.66,397.24 -3869.69,397.24 -3869.69,3561.42 cw(c-3711.65,3561.97) -3712.21,3720 -495,3720 -495,3627 -231,3627 -231,3718.9 -27.17,3718.9 cw(c-25.26,3563.32) 130.31,3561.42 130.31,397.24 67.32,397.24 ccw(c77.69,339.63) 20.08,350 20.08,334.25 ; -3712.2,-279.92 -27.17,-279.92 ; -27.31,-279.92 ccw(c-27.04,-122.57) 130.32,-122.57 ; 20.07,334.29 ccw(c77.86,344.79) 67.26,287.02 ; 67.32,287.01 129.92,287.01 130.31,-122.44

## Other copper
Top:
  region net N16595107: -2964,3033 -2898,3033 -2892,3027 -2892,3006 -2877,2991 -2802,2991 -2779.5,2968.5 -2779.5,2916 -2886,2916 -2886,2949 -2940,2994 -2940,3006 -2949,3015 -2964,3015 -2964,3033
  region net N49360: -792,342 -745.5,388.5 -678,388.5 -678,264 -726,264 -726,297 -757.5,328.5 -834,328.5 -834,342 -792,342
  region net VCC5V0_SYS: -2655,2844 -2787,2844 -2829,2802 -2829,2733 -2781,2733 -2721,2793 -2655,2793 -2655,2844
  region net VCC5V0_SYS: -1441.5,2925 -1464,2925 -1501.5,2887.5 -1539,2887.5 -1539,2826 -1497,2826 -1468.5,2797.5 -1468.5,2748 -1413,2748 -1413,2877 -1441.5,2905.5 -1441.5,2925
  region net VCC5V0_SYS: -3309,2664 -3492,2664 -3492,2613 -3309,2613 -3309,2664
  region net VCC5V0_SYS: -468.66,63 -561,63 -630,-6 -780,-6 -808.5,-34.5 -808.5,-108 -792.75,-123.75 -585,-123.75 -549,-87.75 -549,-39 -538.69,-28.69 -477,-28.69 -468.66,-20.34 -468.66,63
  region net VCC3V3_SYS: -679.5,42 -612,42 -570,84 -465,84 -465,369 -588,369 -588,201 -694.5,94.5 -694.5,57 -679.5,42
  region net VCC5V0_SYS: -2982,2982 -2982,2952 -3003,2931 -3003,2733 -2784,2733 -2784,2802 -2916,2802 -2937,2823 -2937,2919 -2962.5,2944.5 -2973.75,2954.25 -2973.75,2982 -2982,2982
  region net TYPEC-IN12V: -3222,3438 -3222,3399.17 -3179.83,3357 -3084,3357 -3067.5,3340.5 -3067.5,3300 -3000,3300 -3000,3390 -3018,3408 -3198,3408 -3207,3417 -3207,3438 -3222,3438
  region net VCC5V0_SYS: -834,318 -759,318 -736.5,295.5 -736.5,258 -719.25,240.75 -719.25,150 -771,150 -771,282 -792,303 -834,303 -834,318
  region net VCC5V0_USB: -2502,2934 -2538,2934 -2614.5,2857.5 -2614.5,2820 -2565,2820 -2565,2850 -2542.5,2881.89 -2502,2881.89 -2502,2934
  region net TYPEC_IN: -2994,3258 -3072,3258 -3072,3162 -3096,3138 -3096,3060 -3120,3036 -3120,3031.5 -3063,3031.5 -3063,3036 -3054,3045 -2979,3045 -2979,3060 -3030,3060 -3036,3066 -3036,3102 -3018,3120 -3018,3156 -2994,3180 -2994,3258
Bottom:
  region net VCC3V3_PCIE: -3180.56,2031 -3117,2031 -3031.5,1945.5 -3031.5,1890 -2983.67,1842.17 -2981.67,1827.56 -2998.88,1797 -3105,1797 -3180.56,1872.56 -3180.56,2031
  region net TYPEC-IN12V: -3435,3435 -3168,3435 -3168,3384 -3435,3384 -3435,3435
  region net VDD_LCD: -579,474 -306,474 -306,372 -579,372 -579,474
  region net VCC5V0_SYS: -3405.75,935.51 -3396.38,944.88 -3309,944.88 -3309,912 -3301.5,904.5 -3261,904.5 -3251.25,894.75 -3251.25,822 -3267,822 -3267,864 -3271.5,868.5 -3393,868.5 -3405.75,881.25 -3405.75,935.51
  region net FT1: -405,258 -531,258 -531,174 -523.5,166.5 -471,147 -348,147 -348,195 -384,195 -405,216 -405,258
  region net VCC3V3_PCIE: -3115.16,1074.8 -3115.16,1136.75 -3029.45,1136.83 -3020.7,1128.13 -2828.74,1129.78 -2828.74,1219.45 -2887.8,1219.54 -2887.8,1322.83 -3183.07,1322.83 -3183.07,1390.75 -2743.11,1390.75 -2743.11,998.03 -2764.23,998.03 -3028.23,996.59 -3028.23,1074.8 -3115.16,1074.8
  region net VDD_LCD: -197.92,596.46 -240,596.46 -262.5,568.5 -262.5,534 -278.25,518.25 -278.25,492 -281.25,489 -317.62,489 -350.81,455.81 -350.81,372 -300,372 -300,426 -282,444 -228,444 -196.5,475.5 -196.5,512.16 -197.57,537.75 -197.92,596.46
  region net TYPEC-IN: -270,322.5 -270,138 -244.5,112.5 -93,112.5 -50.25,155.25 -50.25,192 -162,192 -183,213 -183,306 -199.5,322.5 -270,322.5
  region net TYPEC_IN: -312,354 -378,354 -378,279 -294,279 -294,336 -312,354
  region net N16473532: -3240,957 -3240,822 -3225,822 -3225,861 -3216,870 -3102,870 -3081,891 -3081,957 -3240,957
  region net N21534: -553.5,261 -597,261 -597,63 -543,63 -543,171 -553.5,181.5 -553.5,261
Multi-Layer:
  circle w4: c-3739.76,-1.18 r68.5
  circle w4: c1.18,3566.54 r78.74
  circle w4: c-3739.76,3566.14 r78.74
  circle w4: c0,0 r68.5

## Silkscreen, mask and mechanical layers (free items; w line width, h text height)
Silkscreen Top:
  text "T R GND" at -2046.26,3386.81 h39.37 r90
  text "RTC" at -3616.54,3069.68 h29.53 r90
  text "MIC" at -5.12,2957.48 h39.37
  text "NPU_DEBUG" at -2143.7,2932.09 h39.37 r90
  text "CAM" at -16.54,2824.02 h39.37
  text "PHONEJACK" at -509.45,2744.49 h39.37
  text "Ethernet" at -1101.57,2738.98 h50
  text "HDMI" at -2616.54,2708.66 h39.37
  text "USB2.0 X 2" at -2134.84,2678.15 h39.37
  text "MIPI" at -3801.18,2139.37 h39.37 r90
  text "A1" at -492.13,1933.07 h49.21
  text "DALANG_V1.3" at -2170.28,1606.3 h59.06
  text "2021.11.25" at -2168.31,1488.19 h59.06
  text "RECOVER" at -3852.36,1169.68 h23.62
  text "A2" at -503.94,582.68 h49.21
  text "A3" at -3419.29,578.74 h49.21
  text "RESET" at -3838.58,557.48 h23.62
  text "EDP" at -116.93,344.49 h49.21
  text "USB3.0" at -3258.27,330.71 h39.37
  text "POE-PWR" at -3018.11,101.97 h39.37
  text "12V+" at -2988.19,5.91 h39.37
  text "-" at -2781.5,5.91 h39.37
  text "IR" at -1683.07,-177.17 h39.37
Silkscreen Bottom:
  circle w4: c-2834.65,673.23 r142.66
  circle w4: c-460.63,1950.79 r144.76
Paste Mask Top:
  drawing of 12 lines, arcs and shapes, not listed